# Altium PCB LCL_015 ESP8266 Serial Programmer (Altium 5).PcbDoc
Units mil, origin at the board's own origin, x right, y up, seen from the top; angles counter-clockwise.
Board outline 1574.8 x 984.25 mil, 2 copper layers (Top Layer, Bottom Layer); 14 components, 15 nets, 66 pads, 4 vias.
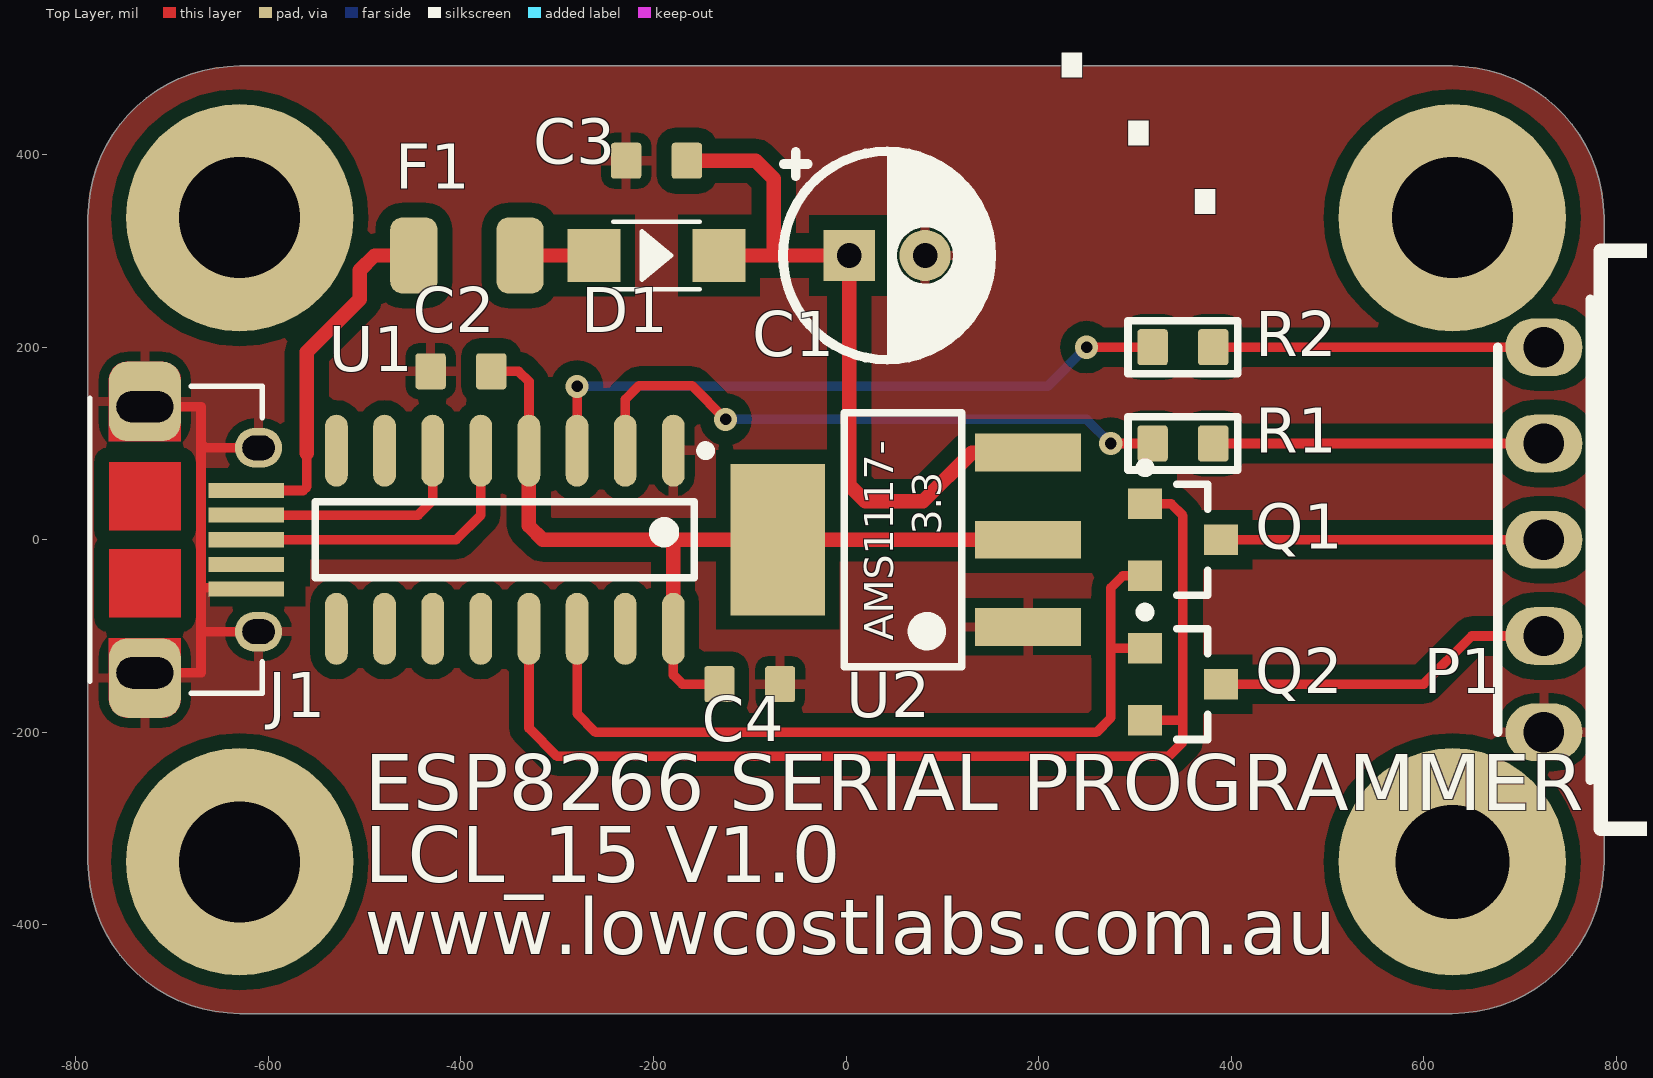
[diagram p0: Top Layer view]
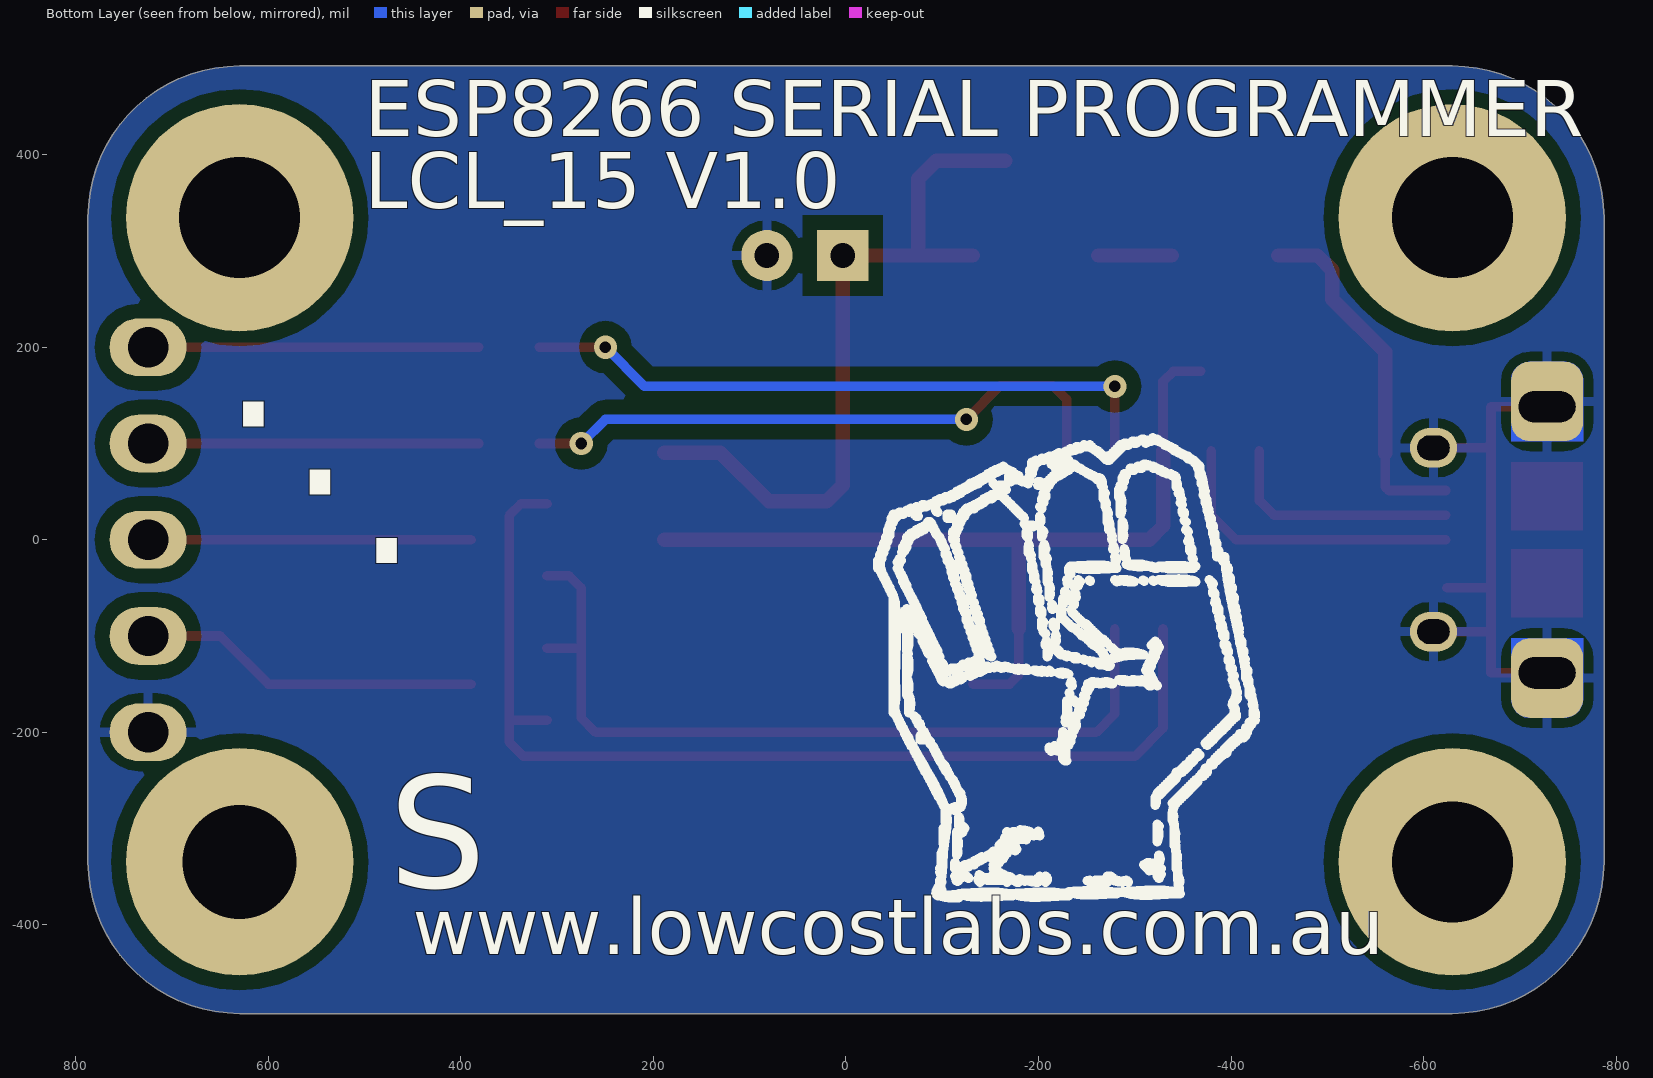
[diagram p1: Bottom Layer view, seen from below]

## Layer stack, top to bottom
Top Solder: solder mask 0.4, Solder Resist, Dk 3.5
Top Layer: signal copper 1.4
Dielectric 1: dielectric 12.6, FR-4, Dk 4.8
Bottom Layer: signal copper 1.4
Bottom Solder: solder mask 0.4, Solder Resist, Dk 3.5

## Board outline
-787.4,-334.65 ccw(c-629.92,-334.65) -629.92,-492.13 629.92,-492.13 ccw(c629.92,-334.65) 787.4,-334.65 787.4,334.65 ccw(c629.92,334.65) 629.92,492.13 -629.92,492.13 ccw(c-629.92,334.65) -787.4,334.65

## Design rules (kind name [scope] priority, off if disabled: settings)
AssemblyTestPointUsage AssemblyTestPointUsage_1 [All] p2:
AssemblyTestpoint AssemblyTestpoint_1 [All] p2: testpointundercomponent=TRUE minsize=40 maxsize=100 preferedsize=60 minholesize=0 maxholesize=40 preferedholesize=32 testpointgrid=1 usegrid=TRUE gridtolerance=0.01 allowsidetop=TRUE allowsidebottom=TRUE
Clearance [All] p1: gap=10 ignorepadtopadclearanceinfootprint=FALSE except(0: Arc-Hole Track-Hole SMDPad-Hole THPad-Hole Via-Hole Fill-Hole Poly-Hole Region-Hole Text-Hole)
Clearance Clearance_1 [All] p2: gap=10 ignorepadtopadclearanceinfootprint=FALSE except(0: Arc-Hole Track-Hole SMDPad-Hole THPad-Hole Via-Hole Fill-Hole Poly-Hole Region-Hole Text-Hole; 15: Arc-Poly Track-Poly SMDPad-Poly THPad-Poly Via-Poly Fill-Poly Poly-Poly)
ComponentClearance ComponentClearance_1 [All] p2: gap=10 collisioncheckmode=3 verticalgap=10 showdistances=FALSE
DiffPairsRouting DiffPairsRouting_1 [All] p2: maxlimit=10 minlimit=10 mostfreqgap=10 toplayer_minwidth=15 toplayer_maxwidth=15 toplayer_prefwidth=15 bottomlayer_minwidth=15 bottomlayer_maxwidth=15 bottomlayer_prefwidth=15 maxuncoupledlength=500
FabricationTestPointUsage FabricationTestPointUsage_1 [All] p2: valid=0 allowmultiple=FALSE
FabricationTestpoint FabricationTestpoint_1 [All] p2: side=3 testpointundercomponent=TRUE minsize=40 maxsize=100 preferedsize=60 minholesize=0 maxholesize=40 preferedholesize=32 testpointgrid=1 allowsidetop=TRUE allowsidebottom=TRUE usegrid=TRUE gridtolerance=0.01
FanoutControl Fanout_LCC [IsLCC] p1: bgadir=Out bgaviamode=Centered fanoutstyle=Auto fanoutdirection=Alternating viagrid=1 // Fanout_LCC (Default Rule)
FanoutControl Fanout_BGA [IsBGA] p2: bgadir=Out bgaviamode=Centered fanoutstyle=Auto fanoutdirection=Alternating viagrid=1 // Fanout_BGA (Default Rule)
FanoutControl Fanout_Small [(CompPinCount < 5)] p3: bgadir=Out bgaviamode=Centered fanoutstyle=Auto fanoutdirection=OutThenIn viagrid=1 // Fanout_Small (Default Rule)
FanoutControl Fanout_SOIC [IsSOIC] p4: bgadir=Out bgaviamode=Centered fanoutstyle=Auto fanoutdirection=Alternating viagrid=1 // Fanout_SOIC (Default Rule)
FanoutControl Fanout_BGA_1 [IsBGA] p6: bgadir=Out bgaviamode=Centered fanoutstyle=Auto fanoutdirection=Alternating viagrid=1 // Fanout_BGA (Default Rule)
FanoutControl Fanout_LCC_1 [IsLCC] p7: bgadir=Out bgaviamode=Centered fanoutstyle=Auto fanoutdirection=Alternating viagrid=1 // Fanout_LCC (Default Rule)
FanoutControl Fanout_SOIC_1 [IsSOIC] p8: bgadir=Out bgaviamode=Centered fanoutstyle=Auto fanoutdirection=Alternating viagrid=1 // Fanout_SOIC (Default Rule)
FanoutControl Fanout_Small_1 [(CompPinCount < 5)] p9: bgadir=Out bgaviamode=Centered fanoutstyle=Auto fanoutdirection=OutThenIn viagrid=1 // Fanout_Small (Default Rule)
FanoutControl Fanout_Default_1 [All] p10: bgadir=Out bgaviamode=Centered fanoutstyle=Auto fanoutdirection=Alternating viagrid=1 // Fanout_Default (Default Rule)
Height Height_1 [All] p2: minheight=0 maxheight=1000 prefheight=500
HoleSize HoleSize_1 [All] p2: absolutevalues=TRUE maxlimit=100 minlimit=1 maxpercent=80.000 minpercent=20.000
HoleToHoleClearance HoleToHoleClearance_1 [All] p2: gap=10 allowstackedmicrovias=TRUE
LayerPairs LayerPairs_1 [All] p2: enforce=TRUE
MinimumSolderMaskSliver MinimumSolderMaskSliver_1 [All] p2: minsoldermaskwidth=10
NetAntennae NetAntennae_1 [All] p2: netantennaetolerance=0
PasteMaskExpansion PasteMaskExpansion_1 [All] p2: expansion=0
PlaneClearance PlaneClearance_1 [All] p2: clearance=20
PlaneConnect PlaneConnect_1 [All] p2: planeconnectstyle=Relief reliefexpansion=20 reliefentries=4 reliefconductorwidth=10 reliefairgap=10
PolygonConnect [All] p1: connectstyle=Relief reliefconductorwidth=10 reliefentries=4 polygonreliefangle="90 Angle" airgapwidth=10
PolygonConnect PolygonConnect_1 [All] p2: connectstyle=Relief reliefconductorwidth=10 reliefentries=4 polygonreliefangle="90 Angle" airgapwidth=10
RoutingCorners RoutingCorners_1 [All] p2: cornerstyle=45-Degree minsetback=100 maxsetback=100
RoutingLayers RoutingLayers_1 [All] p2: top layer_v5=TRUE bottom layer_v5=TRUE
RoutingPriority RoutingPriority_1 [All] p2: routingpriority=0
RoutingTopology RoutingTopology_1 [All] p2: topology=Shortest
RoutingVias [All] p1: holewidth=28 width=50 viastyle="Through Hole" minholewidth=28 minwidth=50 maxholewidth=28 maxwidth=50
RoutingVias RoutingVias_1 [All] p2: holewidth=12 width=24 viastyle="Through Hole" minholewidth=12 minwidth=24 maxholewidth=28 maxwidth=50
ShortCircuit ShortCircuit_1 [All] p2: allowed=FALSE
SilkToBoardRegionClearance SilkToBoardRegionClearance_1 [All] p2:
SilkToSilkClearance SilkToSilkClearance_1 [All] p2: silktosilkclearance=10
SilkToSolderMaskClearance SilkToSolderMaskClearance_1 [IsPad] p2: minsilkscreentomaskgap=10 clearancetoexposedcopper=TRUE
SolderMaskExpansion [All] p1: expansion=4
SolderMaskExpansion SolderMaskExpansion_1 [All] p2: expansion=4
UnRoutedNet UnRoutedNet_1 [All] p2:
UnpouredPolygon UnpouredPolygon_1 [All] p2:
Width [All] p1: maxlimit=10 minlimit=10 preferedwidth=10
Width Width_1 [All] p2: maxlimit=250 minlimit=6 preferedwidth=15
26 further rules are at their usual default settings.

## Components (designator, comment, footprint, x,y, rotation, side; value= is the part's Value field where it differs from the comment)
C1 "10uF" PCB-ekxurobr9mz5kbw5d2ks-1 42.8,295.28 r0 top
C2 "100nF" PCB-xz5e0ntg24ede4ywr789-1 -400,175 r0 top
C3 "100nF" PCB-xz5e0ntg24ede4ywr789-1 -196.85,393.7 r0 top
C4 "100nF" PCB-xz5e0ntg24ede4ywr789-1 -100,-150 r180 top
D1 "B5819W-TP" SOD-123_B -196.85,295.28 r0 top
F1 "1206 500mA" PCB-3gxvn3dwrwfh67y4w0ib-1 -393.7,295.28 r0 top
J1 "Hirose ZX62D-B-5PA8" HIRO-ZX62D-B -728.35,0 r270 top
P1 "Ninigi ZL263-5SG" PCB-0utnuxhvegbjdpyxogng-1 725,0 r180 top
Q1 "MMUN2211LT1G" ONSC-SOT-23-3-318-08_V 350,0 r0 top
Q2 "MMUN2211LT1G" ONSC-SOT-23-3-318-08_V 350,-150 r0 top
R1 "220R" PCB-nyzt47j077kuntqddeld-1 350,100 r0 top
R2 "220R" PCB-nyzt47j077kuntqddeld-1 350,200 r0 top
U1 "CH340G" M16A_L -354.33,0 r270 top
U2 "AMS1117-3.3" AMS1117-SOT223 59.06,0 r180 top

## Footprints (in the part's own frame and the unit in brackets; to place one, negate y for a bottom-side part, rotate by r counter-clockwise, add the part's x,y. Pads: shape width x height; smd on the part's side, far side on the other; paste and mask are expansions set on the pad)
AMS1117-SOT223 [mm]
  rect 2.8x1 smd: 1(-3.3,2.3) 2(-3.3,0) 3(-3.3,-2.3)
  rect 2.5x4 smd: 2(3.3,0)
  silkscreen extent -1.55,-3.35 1.55,3.35, body extent -3.5,-3.25 3.5,3.25, height 1.8
HIRO-ZX62D-B [mm] "HIRO-ZX62D-B"
  rect 0.4x2 smd: 1(-1.3,2.675) 2(-0.65,2.675) 3(0,2.675) 4(0.65,2.675) 5(1.3,2.675)
  rrect52% 2.1x1.9 hole 0.825 slot 1.5 at 90 deg copper offset -0.138,0: SHIELD(-3.512,0)
  rrect100% 1.05x1.25 hole 0.65 slot 0.85 at 90 deg: SHIELD(-2.425,3) SHIELD(2.425,3)
  rrect52% 2.1x1.9 hole 0.825 slot 1.5 at 90 deg copper offset 0.138,0: SHIELD(3.513,0)
  Top Layer region: 0.25,-0.95 2.05,-0.95 2.05,0.95 0.25,0.95
  Top Layer region: -2.05,-0.95 -0.25,-0.95 -0.25,0.95 -2.05,0.95
  Top Layer region: -2.6,0.95 -4.2,0.95 -4.294,0.941 -4.381,0.915 -4.434,0.891 -4.48,0.862 -4.52,0.832 -4.565,0.791 -4.596,0.753 -4.622,0.716 -4.647,0.673 -4.66,0.64 -4.676,0.6 -4.688,0.55 -4.696,0.505 -4.7,0.45 -4.7,-0.45 -4.696,-0.503 -4.689,-0.548 -4.677,-0.599 -4.661,-0.641 -4.641,-0.683 -4.617,-0.724 -4.589,-0.761 -4.56,-0.797 -4.521,-0.831 -4.483,-0.86 -4.439,-0.888 -4.397,-0.908 -4.354,-0.924 -4.301,-0.939 -4.248,-0.946 -4.2,-0.95 -2.6,-0.95
  Top Layer region: 2.6,-0.95 4.2,-0.95 4.294,-0.941 4.381,-0.915 4.434,-0.891 4.48,-0.862 4.52,-0.832 4.565,-0.791 4.596,-0.753 4.622,-0.716 4.647,-0.673 4.66,-0.64 4.676,-0.6 4.688,-0.55 4.696,-0.505 4.7,-0.45 4.7,0.45 4.696,0.503 4.689,0.548 4.677,0.599 4.661,0.641 4.641,0.683 4.617,0.724 4.589,0.761 4.56,0.797 4.521,0.831 4.483,0.86 4.439,0.888 4.397,0.908 4.354,0.924 4.301,0.939 4.248,0.946 4.2,0.95 2.6,0.95
  Bottom Layer region: -2.6,0.95 -4.2,0.95 -4.294,0.941 -4.381,0.915 -4.434,0.891 -4.48,0.862 -4.52,0.832 -4.565,0.791 -4.596,0.753 -4.622,0.716 -4.647,0.673 -4.66,0.64 -4.676,0.6 -4.688,0.55 -4.696,0.505 -4.7,0.45 -4.7,-0.45 -4.696,-0.503 -4.689,-0.548 -4.677,-0.599 -4.661,-0.641 -4.641,-0.683 -4.617,-0.724 -4.589,-0.761 -4.56,-0.797 -4.521,-0.831 -4.483,-0.86 -4.439,-0.888 -4.397,-0.908 -4.354,-0.924 -4.301,-0.939 -4.248,-0.946 -4.2,-0.95 -2.6,-0.95
  Bottom Layer region: 2.6,-0.95 4.2,-0.95 4.294,-0.941 4.381,-0.915 4.434,-0.891 4.48,-0.862 4.52,-0.832 4.565,-0.791 4.596,-0.753 4.622,-0.716 4.647,-0.673 4.66,-0.64 4.676,-0.6 4.688,-0.55 4.696,-0.505 4.7,-0.45 4.7,0.45 4.696,0.503 4.689,0.548 4.677,0.599 4.661,0.641 4.641,0.683 4.617,0.724 4.589,0.761 4.56,0.797 4.521,0.831 4.483,0.86 4.439,0.888 4.397,0.908 4.354,0.924 4.301,0.939 4.248,0.946 4.2,0.95 2.6,0.95
  silkscreen extent -4.05,-1.45 4.05,3.1, body extent -4.05,-2.7 4.05,3.1, height 2.75
M16A_L [mm] "SOIC, 16-Leads, Body 9.9x3.9mm, Pitch 1.27mm, IPC High Density"
  oval 1.9x0.6 smd: 1(-2.35,4.445) 2(-2.35,3.175) 3(-2.35,1.905) 4(-2.35,0.635) 5(-2.35,-0.635) 6(-2.35,-1.905) 7(-2.35,-3.175) 8(-2.35,-4.445) 9(2.35,-4.445) 10(2.35,-3.175) 11(2.35,-1.905) 12(2.35,-0.635) 13(2.35,0.635) 14(2.35,1.905) 15(2.35,3.175) 16(2.35,4.445)
  silkscreen extent -2.47,-5 1,5.42, body extent -3,-4.95 3,4.95, height 1.4
ONSC-SOT-23-3-318-08_V [mm] "SOT23, 3-Leads, Body 2.92x1.3mm, Pitch 0.95mm"
  rect 0.9x0.8 smd: 1(-1,0.95) 2(-1,-0.95) 3(1,0)
  silkscreen extent -1.12,-1.46 0.65,2.02, body extent -0.65,-1.46 0.65,1.46, height 1.11
PCB-0utnuxhvegbjdpyxogng-1 [mil]
  oval 80x60 hole 42: 1(0,200) 2(0,100) 3(0,0) 4(0,-100) 5(0,-200)
  silkscreen extent -394,-300 48,300, body extent -394,-300 -59,300, height 98
PCB-3gxvn3dwrwfh67y4w0ib-1 [mm]
  rrect50% 1.25x2 smd: 1(-1.4,0) 2(1.4,0)
  body extent -1.7,-0.9 1.7,0.9, height 1
PCB-ekxurobr9mz5kbw5d2ks-1 [mm]
  rect 1.35x1.35 hole 0.65: 1(-1,0)
  round 1.35 hole 0.65: 2(1,0)
  silkscreen extent -2.75,-2.75 2.75,2.75, body extent -2.55,-2.64 2.58,2.49, height 5.03
PCB-nyzt47j077kuntqddeld-1 [mm]
  rrect20% 0.8x0.95 smd: 1(-0.8,0) 2(0.8,0)
  silkscreen extent -1.45,-0.7 1.45,0.7, body extent -1,-0.39 1,0.39, height 0.8
PCB-xz5e0ntg24ede4ywr789-1 [mm]
  rrect20% 0.8x0.95 smd: 1(-0.8,0) 2(0.8,0)
  body extent -1,-0.39 1,0.39, height 0.8
SOD-123_B [mil] "SOD-123_B"
  rect 55x55 smd: 1(65,0) 2(-65,0)
  silkscreen extent -45,-35 45,35, body extent -73,-32 73,31, height 53

## Part data
C1: library part CMP-su2zmkw1kc3z49ns9isd-1, "5mm Through Hole Electrolytic 2mm Pitch, 5mm height"
C2 C3 C4: library part "0603 CAPACITOR-1", "GENERIC 0603 CAPACITOR (IPCC COMPLIANT)"
D1: library part CMP-6f92a7ef8d3eb055-1, "Diode Schottky 20v 1a Sod123"
F1: library part CMP-4gkvc5d32zhwfvpctic1-2, "Polyswitch 1206 500mA"
J1: library part CMP-284de3f198a7f78a-3, "HIROSE"
P1: library part CMP-272feff3989ff8e8-1, "Socket; pin strips; female; PIN: 5; angled 90°; 2.54mm; THT; 1x5"
Q1 Q2: library part CMP-866803-1, "Digital Transistor (BRT), R1=10 kOhm, R2=10 kOhm, NPN Transistor, 3-Pin SOT-23, Pb-Free, Tape and Reel"
R1 R2: library part CMP-nyzt47j077kuntqddeld-3, "GENERIC 0603 RESISTOR (IPCC COMPLIANT)"
U1: library part CMP-69cda32a7c8ab60a-2, "CH340G USB To Serial (TTL) Module"
U2: library part CMP-3fd1f74ee88ee016-8, "Sot223/Pkg 1-Amp 3.3-Volt Low Drop Out Voltage Regulatator"

## Free pads (board coordinates)
  round 10 on Mech16: 1(5082.1,-3582.94) 1(5082.1,-3582.94) 1(5082.62,-3660.05) 1(5082.62,-3660.05) 1(5269.4,-3515.17) 1(5269.4,-3515.17)
  round 236.22 hole 125.98: MOUNT(-629.92,334.65) MOUNT(-629.92,-334.65) MOUNT(629.92,334.65)
  round 236.22 hole 118.11: MOUNT(629.92,-334.65)

## Via types
v1: diameter 24, hole 12, Top Layer to Bottom Layer, 4 vias

## Nets (pads, with @x,y where several pads share a name; then routed paths per layer and width w, separated by ;. In a path a pad name is that pad's centre, name@x,y a point inside that pad or via, vN(x,y) a via of type N, cw(c..) or ccw(c..) an arc to the next point about the centre after c; other vN are vias at no path point)
3V3: C2.2 C4.2 U1.4 U1.16 U2.2 | length 909.5
  Top Layer w10: C2.2 -340,175 -329.33,164.33 U1.4 ; U1.16 -179.33,-140.67 -170,-150 C4.2
  Top Layer w15: U1.4 -329.33,14.33 -315,0 -70.87,0 U2.2@188.98,0 ; U1.16 -179.33,-0.67
DTR: Q1.1 Q2.2 U1.13 | length 1120.8
  Top Layer w10: U1.13 -329.33,-195.67 -300,-225 335,-225 350,-210 350,-190 ; Q2.2 347.4,-187.4 350,-190 ; Q1.1 337.6,37.4 350,25 350,-190
GND: C1.2 C2.1 C3.1 C4.1 J1.5 J1.SHIELD P1.1 U1.1 U2.1 | length 559.9
  Top Layer w10: J1.SHIELD@-728.35,-138.29 -670.03,-138.29 -670.03,-95.03 -670,-50 ; J1.SHIELD@-728.35,138.27 -670.04,138.27 -670.04,100.04 -670,100 ; -669.53,-95.47 J1.SHIELD@-610.24,-95.47 ; J1.5@-624.21,-50 -670,-50 ; J1.SHIELD@-610.24,95.47 -665.47,95.47 -670,100 ; -670,-50 -670,100
GPIO_0: P1.2 Q2.3 | length 356.3
  Top Layer w10: Q2.3 600,-150 650,-100 P1.2
NetC1_1: C1.1 C3.2 D1.1 U2.3 | length 765.2
  Top Layer w15: C3.2 -93.7,393.7 -75,375 -75,295.28 ; D1.1 -75,295.28 ; U2.3 130.55,90.55 80,40 20,40 3.43,56.57 C1.1 -75,295.28
NetD1_2: D1.2 F1.2 | length 76.7
  Top Layer w15: F1.2 D1.2
NetR1_1: R1.1 U1.2 | length 631.8
  Top Layer w10: U1.2 -229.33,145.67 -215,160 -160,160 v1(-125,125) ; v1(275,100) R1.1
  Bottom Layer w10: v1(-125,125) 250,125 v1(275,100)
NetR2_1: R2.1 U1.3 | length 681.5
  Top Layer w10: U1.3 v1(-279.33,159.33) ; v1(250,200) R2.1
  Bottom Layer w10: v1(-279.33,159.33) 209.33,159.33 v1(250,200)
RESET: P1.3 Q1.3 | length 335.6
  Top Layer w10: Q1.3 P1.3
RTS: Q1.2 Q2.1 U1.14 | length 869.2
  Top Layer w10: U1.14 -279.33,-180.67 -260,-200 260,-200 275,-185 275,-115 ; Q2.1 277.4,-112.6 275,-115 ; Q1.2 287.6,-37.4 275,-50 275,-115
RX_DATA: P1.5 R2.2 | length 343.5
  Top Layer w10: R2.2 P1.5
TX_DATA: P1.4 R1.2 | length 343.5
  Top Layer w10: R1.2 P1.4
USB_5V: F1.1 J1.1 | length 374.9
  Top Layer w10: J1.1 -563.82,51.18 -560,55 -560,90
  Top Layer w15: -560,90 -560,195 -505,250 -505,280 -489.72,295.28 F1.1
USB_D+: J1.3 U1.5 | length 321.2
  Top Layer w10: J1.3 -405,0 -379.33,25.67 U1.5
USB_D-: J1.2 U1.6 | length 251.8
  Top Layer w10: J1.2 -444.41,25.59 -429.33,40.67 U1.6
pads on no net: J1.4 U1.7 U1.8 U1.9 U1.10 U1.11 U1.12 U1.15

## Polygon pours and split planes (outlines as drawn)
GND on Top Layer "TOP GND" (solid, remove dead copper, pour order 5): -787.4,-334.65 ccw(c-629.92,-334.65) -629.92,-492.13 629.92,-492.13 ccw(c629.92,-334.65) 787.4,-334.65 787.4,334.65 ccw(c629.92,334.65) 629.92,492.13 -629.92,492.13 ccw(c-629.92,334.65) -787.4,334.65
GND on Bottom Layer "BOTTOM GND" (solid, remove dead copper, pour order 7): -787.4,-334.65 ccw(c-629.92,-334.65) -629.92,-492.13 629.92,-492.13 ccw(c629.92,-334.65) 787.4,-334.65 787.4,334.65 ccw(c629.92,334.65) 629.92,492.13 -629.92,492.13 ccw(c-629.92,334.65) -787.4,334.65

## Silkscreen, mask and mechanical layers (free items; w line width, h text height)
Top Overlay:
  text "⋱" at 200,300 h300
  text "ESP8266 SERIAL PROGRAMMER" at -500,-300 h100
  text "LCL_15 V1.0" at -500,-375 h100
  text "www.lowcostlabs.com.au" at -500,-450 h100
Bottom Overlay:
  drawing of 3736 lines, arcs and shapes, not listed
  text "ESP8266 SERIAL PROGRAMMER" at 500,400 h100
  text "LCL_15 V1.0" at 500,325 h100
  text "⋱" at 650,-100 h500
  text "S" at 475,-400 h200
  text "www.lowcostlabs.com.au" at 450,-450 h100
Outline:
  the board outline again, w4.92
Mechanical 32:
  drawing of 655 lines, arcs and shapes, not listed
  text "1" at -4645.67,3996.06 h100
  text "2" at -1377.95,3996.06 h100
  text "3" at 1574.8,3996.06 h100
  text "4" at 4389.76,3996.06 h100
  text "A" at -5767.72,3090.55 h100
  text "A" at 5728.35,3090.55 h100
  text "B" at -5787.4,1003.94 h100
  text "B" at 5708.66,1003.94 h100
  text "C" at -5767.72,-1122.05 h100
  text "C" at 5728.35,-1122.05 h100
  text "D" at -5767.72,-3248.03 h100
  text "D" at 5728.35,-3248.03 h100
  text "LOW COST LABS" at 2696.85,-3307.09 h100
  text "TITLE: ESP8266 Serial Programmer" at 1377.95,-3523.62 h100
  text "ludzinc.blogspot.com.au" at 3725,-3550 h100
  text "SIZE: A4" at 1377.95,-3700.79 h100
  text "Number: LCL_015" at 2204.72,-3700.79 h100
  text "Revison 1.00" at 2992.13,-3700.79 h100
  text "www.lowcostlabs.com.au" at 3740.16,-3700.79 h100
  text "DATE:" at 1377.95,-3818.9 h100
  text ".Print_Date" at 1614.17,-3818.9 h100
  text "SHEET 1 of 1" at 2992.13,-3818.9 h100
  text "FILE:" at 1377.95,-3917.32 h100
  text ".Pcb_File_Name" at 1614.17,-3917.32 h100
  text "S" at -5649.61,-3937.01 h500
  text "1" at -4645.67,-4055.12 h100
  text "2" at -1377.95,-4055.12 h100
  text "3" at 1574.8,-4055.12 h100
  text "4" at 4389.76,-4055.12 h100

## Text inside footprints (layer, text, board x,y; h text height)
U2: Top Overlay "AMS1117-" at 49.06,-105 h30 r90; Top Overlay "3.3" at 99.06,5 h30 r90